# EAGLE board v3_bluetooth-20x20_chip-ant_dc-dc (EAGLE 9.0.0)
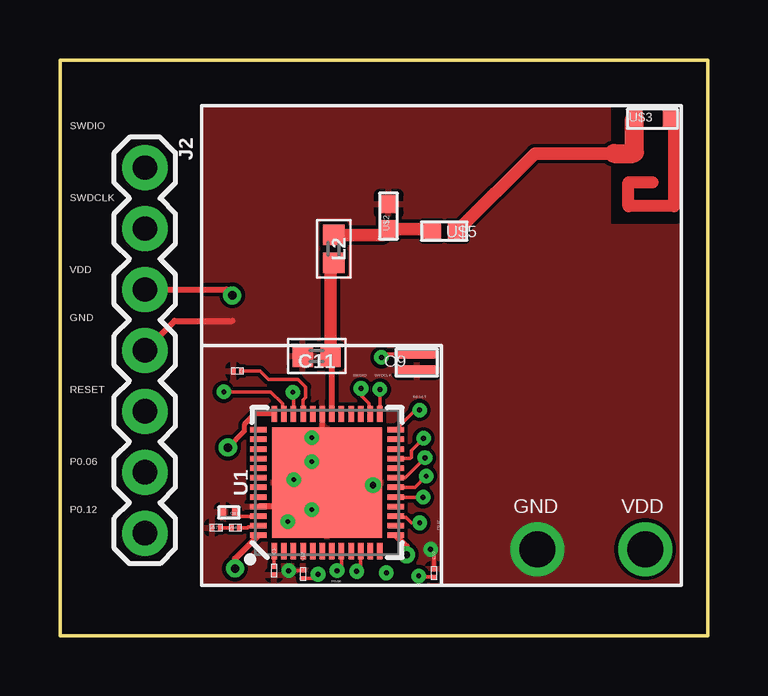
[diagram p0: board, top side]
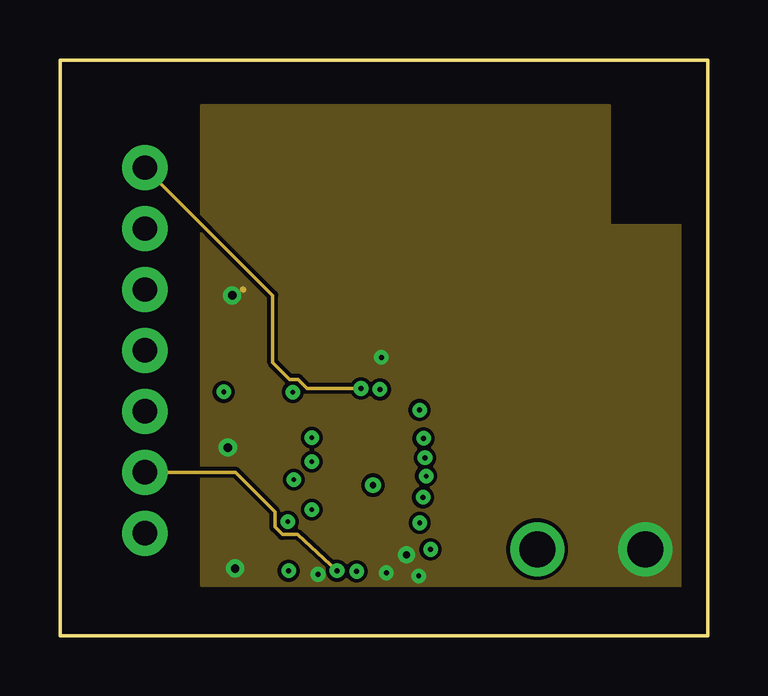
[diagram p1: board, inner layer Route8]
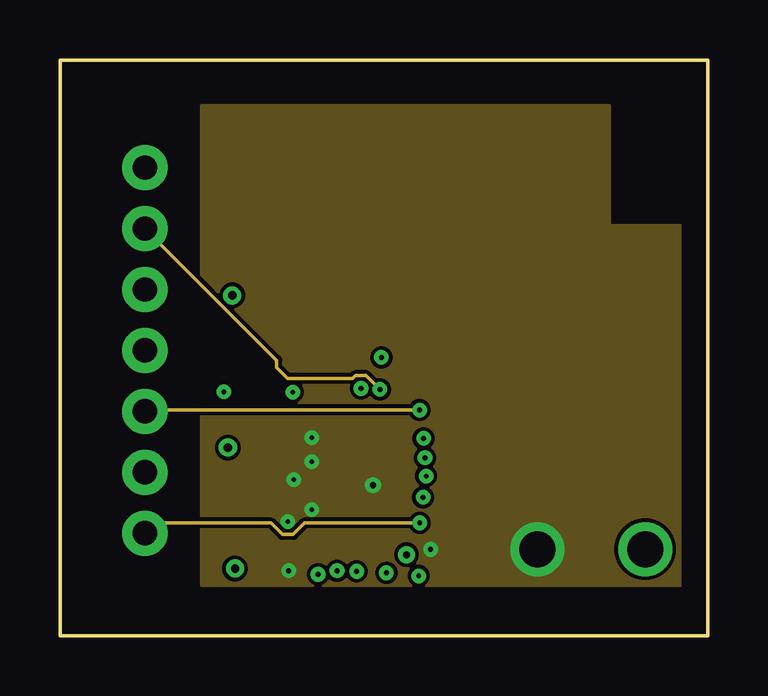
[diagram p2: board, inner layer Route10]
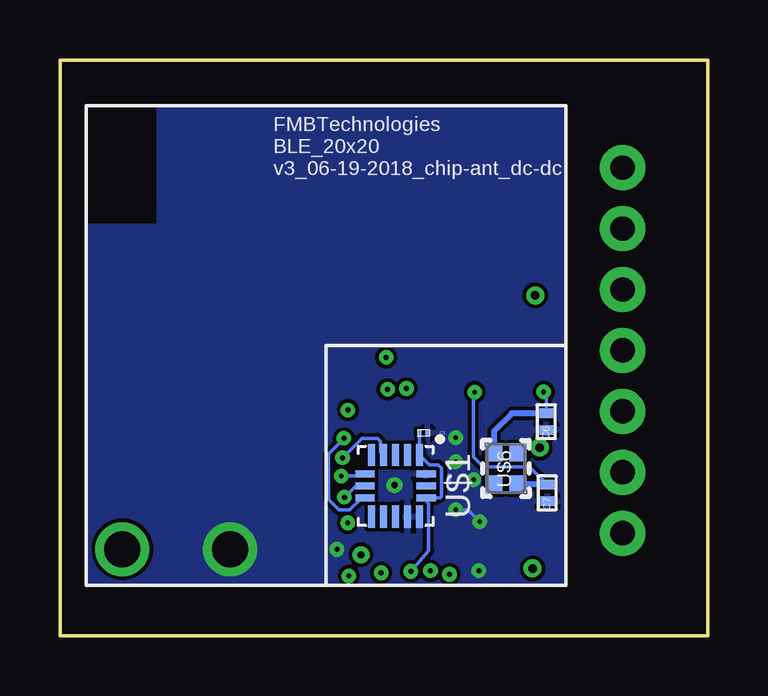
[diagram p3: board, bottom side, seen from below]

Size 27 x 24 mm. Coordinates in mm from the lower left corner, seen from the top.
Outline: 0,0 0,24 27,24 27,0 0,0
Copper layers (1*8*10*16): Top 0.035mm / dielectric 0.175mm / Route8 0.017mm / dielectric 0.145mm / Route10 0.017mm / dielectric 0.175mm / Bottom 0.035mm
Design rules "default *": minimum track width 6mil, minimum drill 8mil, track to track 6mil, track to pad 6mil, pad to pad 6mil, via to via 6mil, smd to smd 6mil, copper to edge 40mil, drill to drill 6mil, minimum pad ring 10mil, minimum via ring 8mil, stop-mask expansion 4mil, vias tented up to drill 0mil, thermal gap 10mil

## Footprints (pad centres in the part's own frame; a part is rotated, then mirrored left to right if it is on the bottom)
CAP_0402-L = smd 0.178 x 0.254: 1 -0.152,0; 2 0.178,0
CAPC1005X55N = smd 0.4 x 0.6: 1 -0.4,0; 2 0.3,0
CAPC0502X28N = smd 0.25 x 0.3: 1 -0.3,0; 2 0.2,0
4P7UFCAPACITOR = smd 0.35 x 1.6: 1 -0.4,0.1; 2 0.25,0.1
0402 = smd 0.85 x 0.9: 1 -0.58,0; 2 0.58,0
1X07 = drill 1.016 pad 1.88: 1 0,0; 2 2.54,0; 3 5.08,0; 4 7.62,0; 5 10.16,0; 6 12.7,0; 7 15.24,0
QFN48-6X6MM = smd 0.68 x 0.23: 1 -2.86,2.2; 2 -2.86,1.8; 3 -2.86,1.4; 4 -2.86,1; 5 -2.86,0.6; 6 -2.86,0.2; 7 -2.86,-0.2; 8 -2.86,-0.6; 9 -2.86,-1; 10 -2.86,-1.4; 11 -2.86,-1.8; 12 -2.86,-2.2; 25 2.86,-2.2; 26 2.86,-1.8; 27 2.86,-1.4; 28 2.86,-1; 29 2.86,-0.6; 30 2.86,-0.2; 31 2.86,0.2; 32 2.86,0.6; 33 2.86,1; 34 2.86,1.4; 35 2.86,1.8; 36 2.86,2.2 | smd 0.23 x 0.68: 13 -2.2,-2.86; 14 -1.8,-2.86; 15 -1.4,-2.86; 16 -1,-2.86; 17 -0.6,-2.86; 18 -0.2,-2.86; 19 0.2,-2.86; 20 0.6,-2.86; 21 1,-2.86; 22 1.4,-2.86; 23 1.8,-2.86; 24 2.2,-2.86; 37 2.2,2.86; 38 1.8,2.86; 39 1.4,2.86; 40 1,2.86; 41 0.6,2.86; 42 0.2,2.86; 43 -0.2,2.86; 44 -0.6,2.86; 45 -1,2.86; 46 -1.4,2.86; 47 -1.8,2.86; 48 -2.2,2.86 | smd 4.6 x 4.6: EP 0,0
TFLGA-16/3.3MMX3.1MM = smd 0.3 x 0.8: CS 0.5,-1.275; GND@3 -0.5,1.275; MISO 0,-1.275; MOSI -0.5,-1.275; NC@2 0,1.275; VS 0.5,1.275 | smd 0.925 x 0.3: GND@1 1.288,0.5; GND@2 1.288,1; INT1 1.288,0; INT2 1.288,-1; NC@1 -1.288,0.5; RESERVED@1 -1.288,0; RESERVED@2 -1.288,-1; RESERVED@3 1.288,-0.5; SCLK -1.288,-0.5; VDD/IO -1.288,1
0402' = smd 0.75 x 0.75: 1 -1.62,0; 2 -0.57,0
2450AT14A0100 = smd 0.65 x 0.8: FEED 0.3,0.4; NC 1.8,0.4
0402'' = smd 0.178 x 0.254: 1 -0.152,0; 2 0.178,0
0402-1005 = smd 0.75 x 0.75: 1 -0.35,0; 2 0.7,0
32MHZCRYSTAL = smd 0.75 x 0.7: 1 0.485,0.47; 2 1.835,0.47; 3 1.835,1.47; 4 0.485,1.47

## Placement (x,y rotation side)
C1  C0402X5R0G104M020BCCAP_0402-L  [CAP_0402-L]  11.83,8.45 180 bottom
C3  C0402X5R0G104M020BCCAP_0402-L  [CAP_0402-L]  8.93,2.72 270 top
C4  C0402C0G1C101J020BCCAP_0402-L  [CAP_0402-L]  7.41,11.03 180 top
C6  GRM1555C1H6R0CA01D  [CAPC1005X55N]  6.72,8.97 90 bottom
C7  GRM1555C1H6R0CA01D  [CAPC1005X55N]  6.68,6 90 bottom
C8  GRMMDXR60J105ME05D  [CAPC0502X28N]  6.99,5.16 180 top
C9  4P7UFCAPACITOR4P7UFCAPACITOR  [4P7UFCAPACITOR]  14.98,11.48 90 top
C10  C0402X5R0G104M020BCCAP_0402-L  [CAP_0402-L]  15.59,2.62 270 top
C11  0.8pF  [0402]  10.7,11.66 0 top
C12  C0402X5R0G104M020BCCAP_0402-L  [CAP_0402-L]  10.13,2.56 270 top
J2  header  [1X07]  3.54,19.51 270 top
L2  3.9nH  [0402]  11.41,16.13 90 top
U1  NRF52832  [QFN48-6X6MM]  11.14,6.38 90 top
U$1  ADXL362  [TFLGA-16/3.3MMX3.1MM]  13.01,6.24 270 bottom
U$2  TUNINGINDUCTOR  [0402']  13.7,18.57 90 top
U$3  2450AT14A0100  [2450AT14A0100]  23.65,21.15 0 top
U$4  INDUCTOR  [0402'']  7.3,4.5 0 top
U$5  0402-1005  [0402-1005]  16.21,16.86 180 top
U$6  32MHZCRYSTAL  [32MHZCRYSTAL]  7.44,5.81 90 bottom
U$7  INDUCTOR  [0402'']  6.5,4.5 0 top

## Library data of the parts
C1 C3 C10 C12 = 0p1_uF_capacitor; MANUFACTURER_PART_NUMBER: C0402C0G1C101J020BC; VENDOR: TDK
C4 = 100_pF_capacitor; MANUFACTURER_PART_NUMBER: C0402C0G1C101J020BC; VENDOR: TDK
C6 C7 = 6pf_capacitor_new-bigger; DESCRIPTION: 0402 6 pF 50 V ±0.25 pF Tolerance C0G SMT Multilayer Ceramic Capacitor; DIGI-KEY_PART_NUMBER: 490-8222-1-ND; DIGI-KEY_PURCHASE_URL: https://www.digikey.com/product-detail/en/murata-electronics-north-america/GRM1555C1H6R0CA01D/490-8222-1-ND/4380516?WT.z_cid=ref_snapeda&utm_source=snapeda&utm_medium=aggregator&utm_campaign=buynow; MF: Murata; MP: GRM1555C1H6R0CA01D; PACKAGE: 0402 Murata
C8 = 1UFCAPACITOR; DESCRIPTION: Cap, Mlcc, X5r, 1uf, 6.3v, 015008; DIGI-KEY_PART_NUMBER: 490-13424-1-ND; DIGI-KEY_PURCHASE_URL: https://www.digikey.com/product-detail/en/murata-electronics-north-america/GRMMDXR60J105ME05D/490-13424-1-ND/6023636?WT.z_cid=ref_snapeda&utm_source=snapeda&utm_medium=aggregator&utm_campaign=buynow; MF: Murata; MP: GRMMDXR60J105ME05D; PACKAGE: 015008 Murata
C9 = 4p7_uF_capacitor; MANUFACTURER_PART_NUMBER: C0816X5R0J475M050AC; VENDOR: TDK
C11 = nrf52832-breakout-temp; PROD_ID: CAP-13456
J2 = SparkFun-Connectors
L2 = nrf52832-breakout-temp; PROD_ID: NDUC-13457
U1 = nrf52832-breakout-temp; PROD_ID: IC-13460
U$1 = ADXL362
U$2 = tuninginductor
U$3 = antennanew
U$4 U$7 = inductor
U$5 = 0402-1005
U$6 = 32_mhz_crystal

## Nets
ADXL_POWER-QFAA: C1.2 U1.10 U$1.VDD/IO U$1.VS
ANT-QFAA: C11.2 L2.1 U1.30
CS-QFAA: U1.21 U$1.CS
DEC1-QFAA: C3.1 U1.1
DEC3-QFAA: C4.1 U1.33
DEC4-QFAA: C8.1 U1.46
GND: C1.1 C3.2 C4.2 C6.1 C7.1 C8.2 C9.1 C10.1 C11.1 C12.1 J2.4 U1.31 U1.45 U1.EP U$1.GND@1 U$1.GND@2 U$1.GND@3 U$2.2 U$7.1
MISO-QFAA: U1.17 U$1.MISO
MOSI-QFAA: U1.18 U$1.MOSI
N$1: L2.2 U$2.1 U$5.2
N$2: U$3.FEED U$5.1
N$4: U1.47 U$4.2
N$5: U$4.1 U$7.2
P0.06-QFAA: J2.6 U1.8
P0.12-QFAA: J2.7 U1.15
RESET-QFAA: J2.5 U1.24
SCLK-QFAA: U1.19 U$1.SCLK
SWDCLK-QFAA: J2.2 U1.25
SWDIO-QFAA: J2.1 U1.26
VDD: C9.2 C10.2 C12.2 J2.3 U1.13 U1.36 U1.48
XC1-QFAA: C7.2 U1.34 U$6.1
XC2-QFAA: C6.2 U1.35 U$6.3

## Tracks (layer width: path | path; a pad name or v marks a point on that pad's centre or on a via)
ADXL_POWER-QFAA  (via drill 0.2)
  Top 0.152: U1.10 12.54,2.63 v12.37,2.68
  Bottom 0.152: C1.2 U$1.VDD/IO 11.6,7.12 11.24,7.12 11.1,6.99 11.1,6.78 | v12.37,2.68 11.63,3.53 11.63,5.51 11.73,5.62 U$1.VS 11.16,5.74 11.1,5.8 11.1,6.78 | 11.1,6.78
ANT-QFAA
  Top 0.254: U1.30 11.34,11.6 C11.2
  Top 0.517: C11.2 11.28,15.42 L2.1
CS-QFAA  (via drill 0.2)
  Top 0.152: v15.16,8.22 14.66,7.72 14.66,7.43 14.6,7.38 U1.21
  Bottom 0.152: U$1.CS 14.41,5.74 14.92,5.23 15.36,5.23 15.8,5.67 15.8,7.58 v15.16,8.22
DEC1-QFAA
  Top 0.152: U1.1 8.94,3.02 C3.1
DEC3-QFAA
  Top 0.152: C4.1 8.34,11.03 8.69,10.68 9.93,10.68 10.24,10.37 10.24,9.93 10.14,9.82 U1.33
DEC4-QFAA
  Top 0.152: C8.1 7.47,4.98 U1.46
GND  (via drill 0.2, 0.25, 1.5)
  Top 0.152: C10.1 15.59,3.46 v15.46,3.59 | C12.1 9.57,2.69 v9.54,2.71
  Top 0.203: U1.31 10.94,6.58 U1.EP | U1.EP 9.87,6.38 v9.75,6.5 | U1.EP 10.14,5.38
  Top 0.254: 10.14,5.38 U1.45 | J2.4 4.78,13.12 7.19,13.12
  Bottom 0.152: 10.74,6.35 10.77,6.56 10.79,6.7 | v9.5,4.75 10,5.25 v10.5,5.25 | 11.67,6.68 U$1.GND@3
  other vias: 13.05,6.27 10.5,8.25 10.5,7.25 19.9,3.6
  pour Top (isolate 0.132): 5.9,2.1 5.9,22.1 22.9,22.1 22.9,17.1 25.9,17.1 25.9,2.1
  pour Bottom (isolate 0.132): 5.9,2.1 5.9,22.1 22.9,22.1 22.9,17.1 25.9,17.1 25.9,2.1
  pour Route10: 5.9,2.1 5.9,22.1 22.9,22.1 22.9,17.1 25.9,17.1 25.9,2.1
MISO-QFAA  (via drill 0.2)
  Top 0.152: v15.14,5.76 14.01,5.76 U1.17
  Bottom 0.152: U$1.MISO 14.66,6.24 v15.14,5.76
MOSI-QFAA  (via drill 0.2)
  Top 0.152: v15.27,6.65 14.8,6.18 U1.18
  Bottom 0.152: U$1.MOSI 14.38,6.65 v15.27,6.65
N$1
  Top 0.517: L2.2 13.46,16.71 U$2.1 15.42,16.95 U$5.2
N$2
  Top 0.517: U$5.1 19.8,20.1 23.1,20.1
  Top 0.8: 23.1,20.1 23.9,20.1 23.95,20.15 U$3.FEED
N$3
  Top 0.5: 25.6,21.7 25.6,17.9 23.7,17.9 23.7,18.9 24.7,18.9
N$4
  Top 0.152: U$4.2 7.82,4.5 7.85,4.53 8.23,4.53 U1.47
N$5
  Top 0.152: U$4.1 U$7.2
P0.06-QFAA  (via drill 0.2)
  Top 0.152: U1.8 11.74,2.91 v11.55,2.71
  Route8 0.152: J2.6 7.31,6.81 8.97,5.16 8.97,4.53 9.28,4.22 9.91,4.22 v11.55,2.71
P0.12-QFAA  (via drill 0.2)
  Top 0.152: U1.15 14.05,4.92 14.43,4.92 14.66,4.7 v15,4.7
  Route10 0.152: J2.7 3.97,4.7 8.8,4.7 9.28,4.22 9.72,4.22 10.2,4.7 v15,4.7
RESET-QFAA  (via drill 0.2)
  Top 0.152: U1.24 14.82,9.4 v15,9.4
  Route10 0.152: v15,9.4 3.59,9.4 J2.5
SCLK-QFAA  (via drill 0.2)
  Top 0.152: U1.19 14.39,6.58 v15.22,7.41
  Bottom 0.152: U$1.SCLK 13.63,7.65 13.63,8.09 13.76,8.22 14.41,8.22 v15.22,7.41
SWDCLK-QFAA  (via drill 0.2)
  Top 0.152: U1.25 v13.34,10.27
  Route10 0.152: v13.34,10.27 12.77,10.84 12.33,10.84 12.21,10.71 9.5,10.71 9.04,11.17 9.04,11.47 J2.2
SWDIO-QFAA  (via drill 0.2)
  Top 0.152: U1.26 12.88,9.29 12.88,9.67 12.55,10 v12.55,10.3
  Route8 0.152: v12.55,10.3 10.31,10.3 9.93,10.68 9.57,10.68 8.87,11.39 8.87,14.18 J2.1
VDD  (via drill 0.2, 0.3, 0.35, 1.5)
  Top 0.152: C10.2 15,2.44 v14.96,2.48 | C12.2 10.06,2.4 10.52,2.4 v10.76,2.55 | C9.2 13.53,11.73 v13.4,11.6
  Top 0.203: v7,7.84 7.68,8.52 7.68,8.8 8.12,9.24 U1.36
  Top 0.254: U1.13 14.45,3.73 v14.45,3.37 | J2.3 6.94,14.43 v7.18,14.18 | U1.48 7.3,3.2 v7.3,2.8
  Route8 0.152: v10.76,2.55 10.85,2.55
  Route8 0.254: 7.63,14.43 7.64,14.42
  other vias: 13.61,2.61 24.4,3.6
  pour Route8: 5.9,2.1 5.9,22.1 22.9,22.1 22.9,17.1 25.9,17.1 25.9,2.1
XC1-QFAA  (via drill 0.2)
  Top 0.152: v9.71,10.15 9.74,10.12 U1.34
  Bottom 0.152: C7.2 7.42,7.04 9.35,7.04 9.76,7.45 9.76,10.1 v9.71,10.15
  Bottom 0.254: C7.2 U$6.1
XC2-QFAA  (via drill 0.2)
  Top 0.152: U1.35 9.28,9.29 9.28,9.67 8.79,10.16 v6.83,10.16
  Bottom 0.152: C6.2 6.72,10.05 v6.83,10.16
  Bottom 0.254: C6.2 8.16,9.27 8.91,8.53 U$6.3

## Text on the board
tSilk: SWDIO | SWDCLK | VDD | GND | SWDIO | SWDCLK | RESET | RESET | P0.06 | P0.12 | P0.12 | GND | VDD | P0.06
_bsilk: FMBTechnologies / BLE_20x20 / v3_06-19-2018_chip-ant_dc-dc